# EAGLE board esquematico3 (EAGLE 9.2.1)
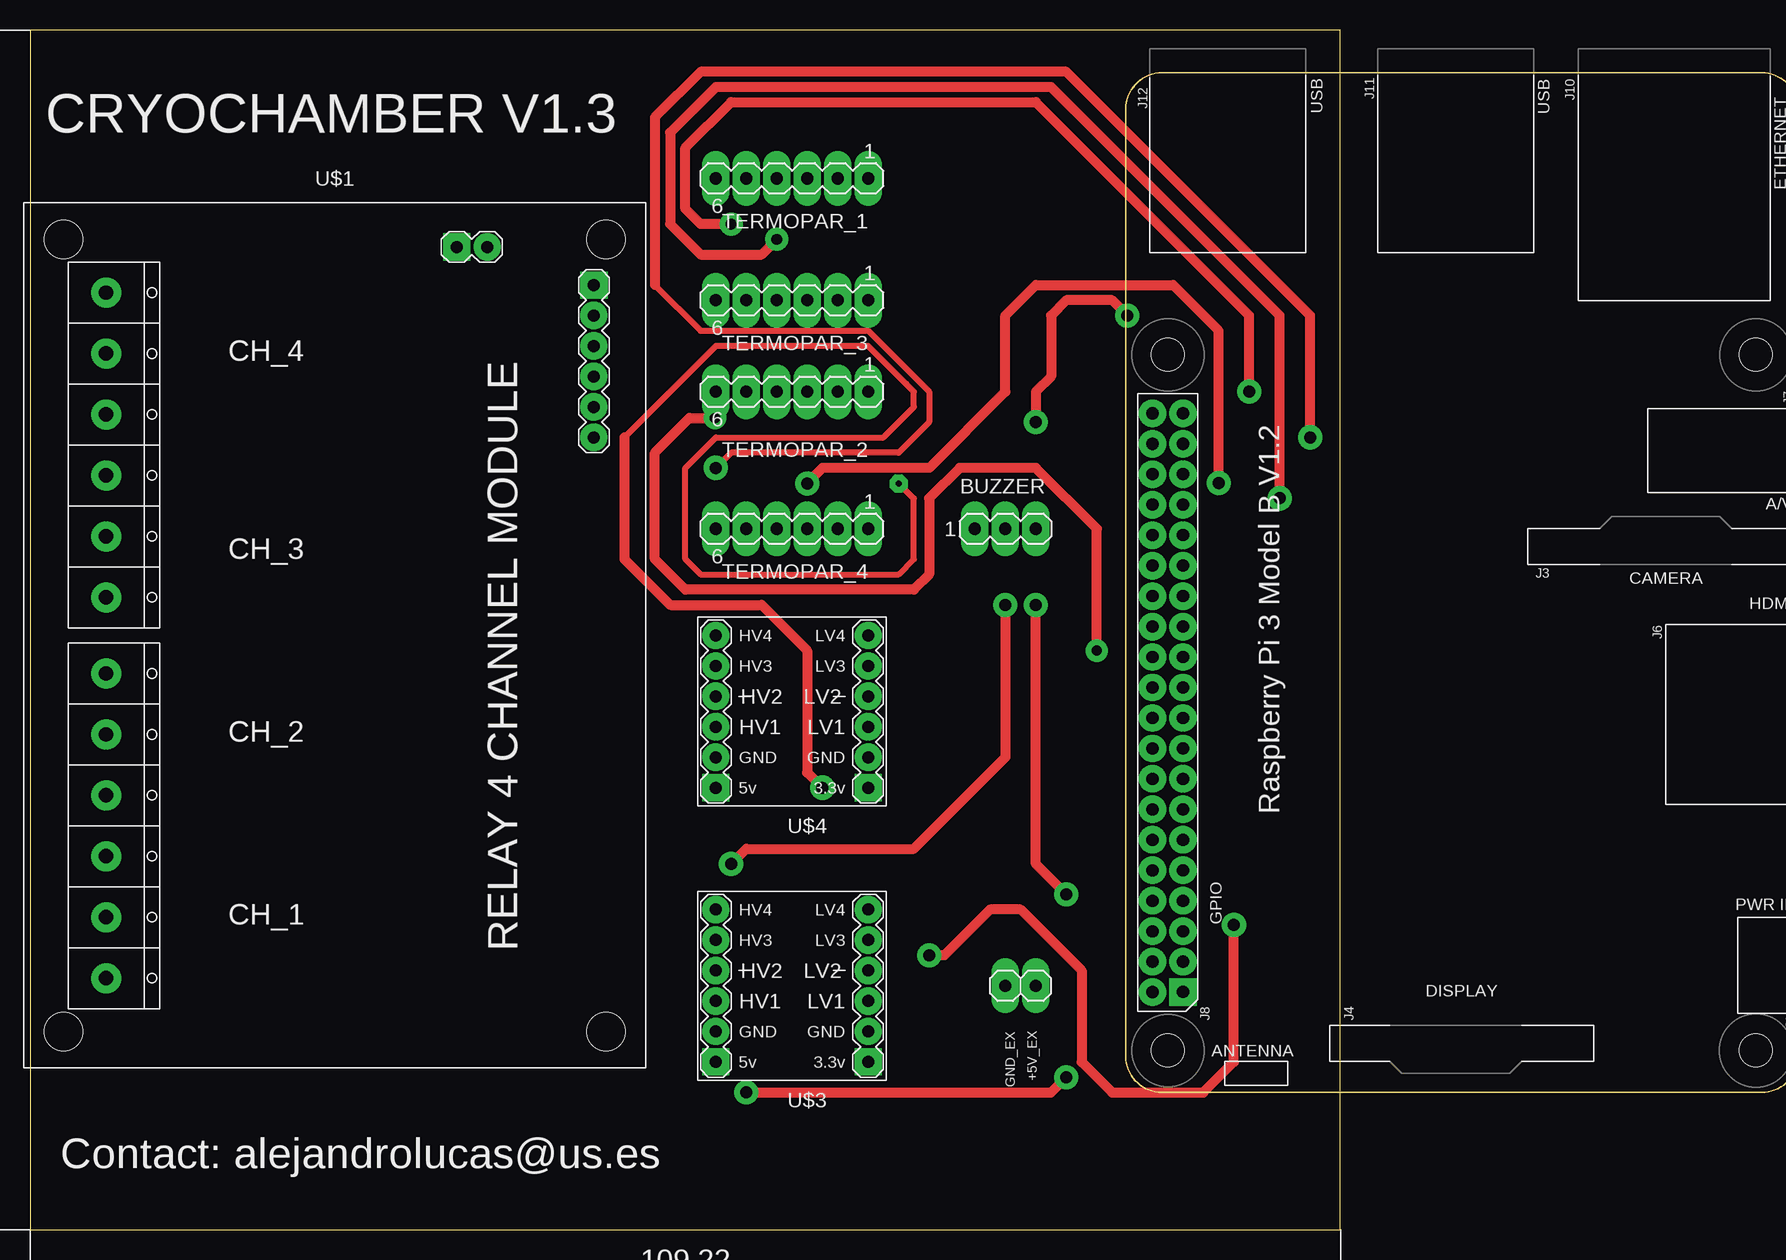
[diagram p0: board, top side]
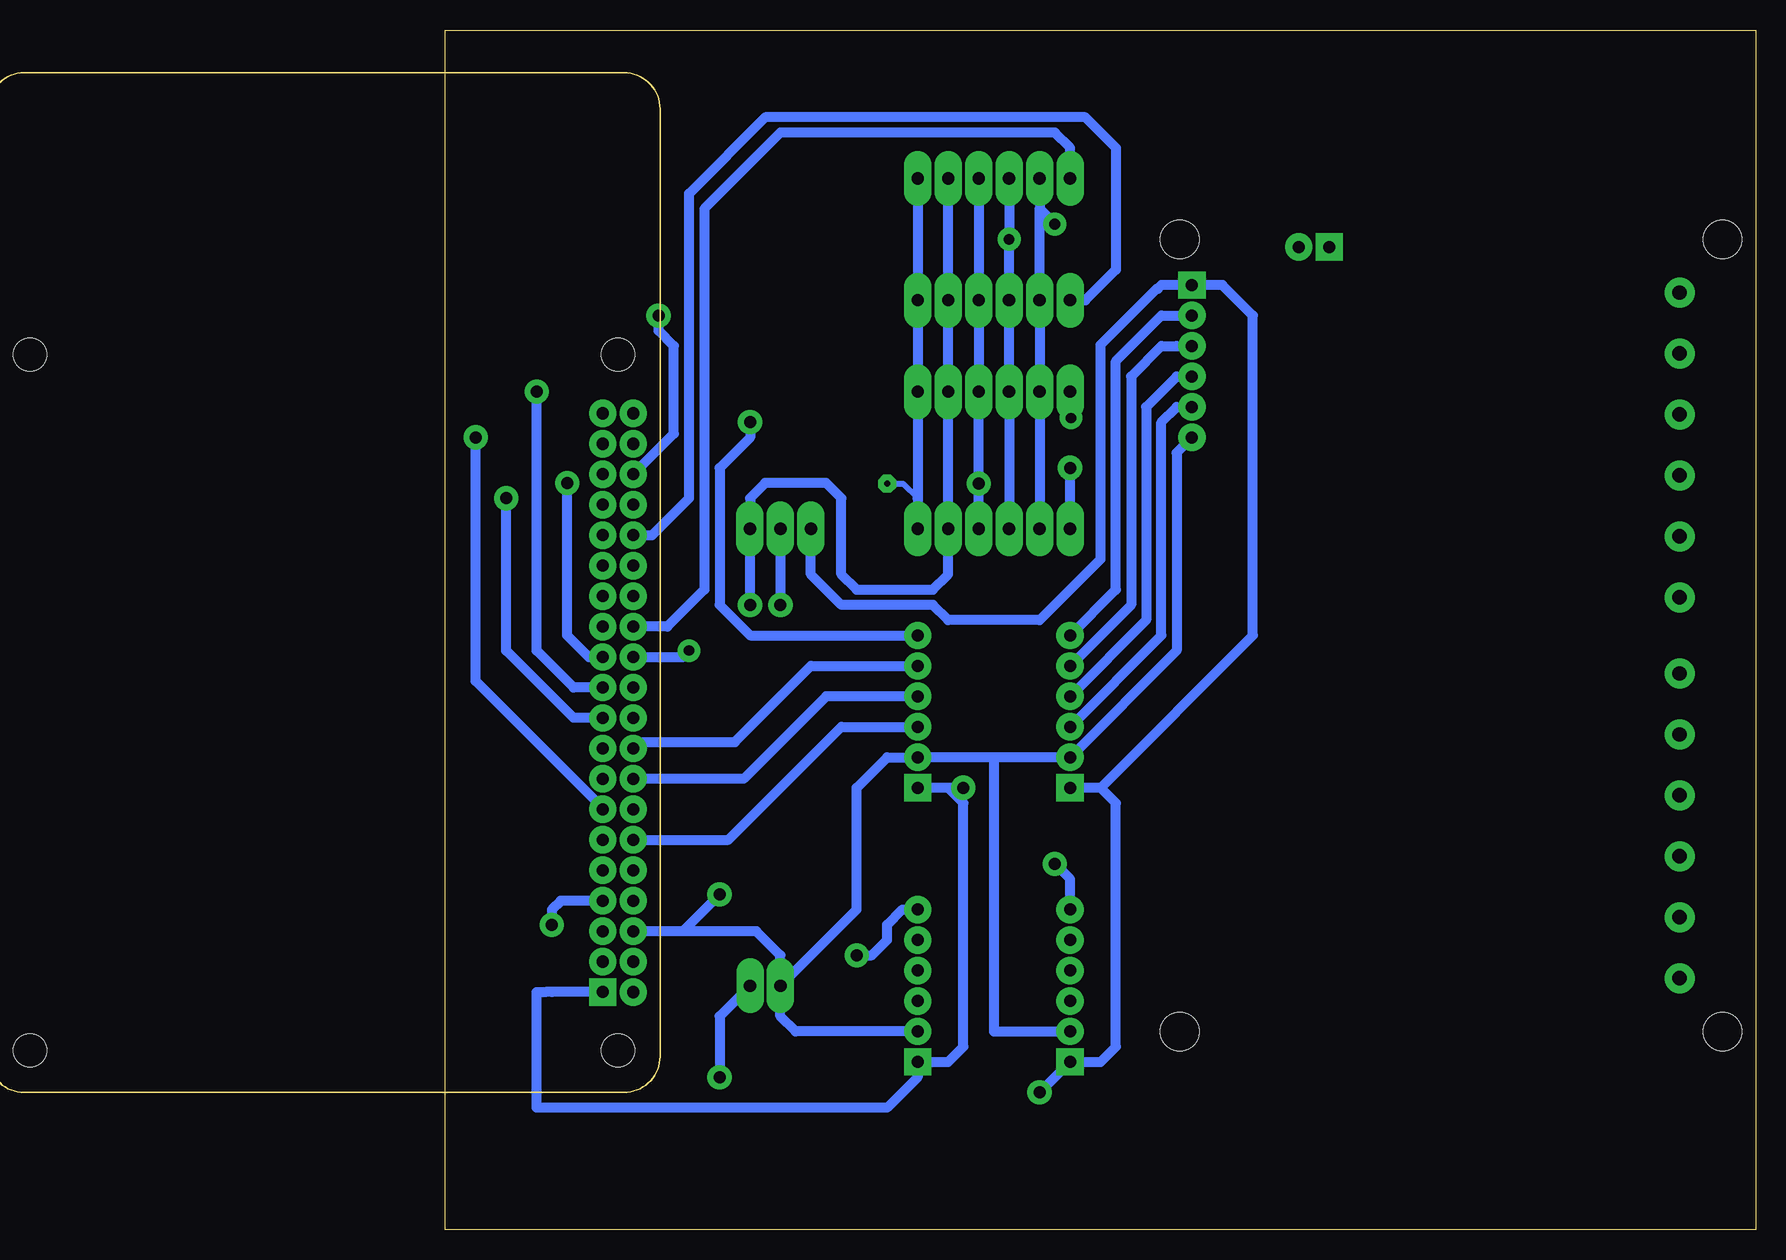
[diagram p1: board, bottom side, seen from below]

Size 109.2 x 100 mm. Coordinates in mm from the lower left corner, seen from the top.
Outline: 0,0 109.2,0 109.2,100 0,100 0,0
Copper layers (1*16): Top 0.035mm / dielectric 1.5mm / Bottom 0.035mm
Design rules "default *": minimum track width 6mil, minimum drill 0.35mm, track to track 6mil, track to pad 6mil, pad to pad 6mil, via to via 6mil, smd to smd 6mil, copper to edge 40mil, drill to drill 6mil, minimum pad ring 25mil, minimum via ring 20mil, stop-mask expansion 4mil, vias tented up to drill 0mil, thermal gap 10mil

## Footprints (pad centres in the part's own frame; a part is rotated, then mirrored left to right if it is on the bottom)
1X02 = drill 1.016 long: 1 -1.27,0; 2 1.27,0
MA03-1 = drill 1.016 long: 1 -2.54,0; 2 0,0; 3 2.54,0
RPI3 = drill 1.016 square: P$1 8.37,51.23 | drill 1.016: P$2 8.357,53.772; P$3 10.897,51.232; P$4 10.897,53.772; P$5 13.437,51.232; P$6 13.437,53.772; P$7 15.977,51.232; P$8 15.977,53.772; P$9 18.517,51.232; P$10 18.517,53.772; P$11 21.057,51.232; P$12 21.057,53.772; P$13 23.597,51.232; P$14 23.597,53.772; P$15 26.137,51.232; P$16 26.137,53.772; P$17 28.677,51.232; P$18 28.677,53.772; P$19 31.217,51.232; P$20 31.217,53.772; P$21 33.757,51.232; P$22 33.757,53.772; P$23 36.297,51.232; P$24 36.297,53.772; P$25 38.837,51.232; P$26 38.837,53.772; P$27 41.377,51.232; P$28 41.377,53.772; P$29 43.917,51.232; P$30 43.917,53.772; P$31 46.457,51.232; P$32 46.457,53.772; P$33 48.997,51.232; P$34 48.997,53.772; P$35 51.537,51.232; P$36 51.537,53.772; P$37 54.077,51.232; P$38 54.077,53.772; P$39 56.617,51.232; P$40 56.617,53.772 | hole 2.75: 3.5,3.5; 61.5,3.5; 3.5,52.5; 61.5,52.5
MA06-1 = drill 1.016 long: 1 -6.35,0; 2 -3.81,0; 3 -1.27,0; 4 1.27,0; 5 3.81,0; 6 6.35,0
RELAY-4-SRD#RC = drill 1 square: J1.1 20.32,29.21; J2.1 8.89,32.385 | drill 1: J1.2 20.32,26.67; J1.3 20.32,24.13; J1.4 20.32,21.59; J1.5 20.32,19.05; J1.6 20.32,16.51; J2.2 11.43,32.385 | drill 1.2 pad 2.5: P1.1 -20.32,28.575; P1.2 -20.32,23.495; P1.3 -20.32,18.415; P1.4 -20.32,13.335; P1.5 -20.32,8.255; P1.6 -20.32,3.175; P2.1 -20.32,-3.175; P2.2 -20.32,-8.255; P2.3 -20.32,-13.335; P2.4 -20.32,-18.415; P2.5 -20.32,-23.495; P2.6 -20.32,-28.575 | hole 3.2: -23.876,33.02; 21.336,33.02; 21.336,-33.02; -23.876,-33.02
LEVEL-SHIFTER-4CH = drill 1 square: J1.1 -5.08,6.35; J2.1 7.62,6.35 | drill 1: J1.2 -5.08,3.81; J1.3 -5.08,1.27; J1.4 -5.08,-1.27; J1.5 -5.08,-3.81; J1.6 -5.08,-6.35; J2.2 7.62,3.81; J2.3 7.62,1.27; J2.4 7.62,-1.27; J2.5 7.62,-3.81; J2.6 7.62,-6.35

## Placement (x,y rotation side)
+5V_EX  [1X02]  82.55,20.32 180 top
BUZZER  [MA03-1]  81.28,58.42 0 top
PCB1  RPI3RPI3  [RPI3]  147.32,11.43 90 top
TERMOPAR_1  [MA06-1]  63.5,87.63 180 top
TERMOPAR_2  [MA06-1]  63.5,69.85 180 top
TERMOPAR_3  [MA06-1]  63.5,77.47 180 top
TERMOPAR_4  [MA06-1]  63.5,58.42 180 top
U$1  RELAY-4-SRD#RC  [RELAY-4-SRD#RC]  26.67,49.53 0 top
U$3  LEVEL-SHIFTER-4CH  [LEVEL-SHIFTER-4CH]  64.77,20.32 180 top
U$4  LEVEL-SHIFTER-4CH  [LEVEL-SHIFTER-4CH]  64.77,43.18 180 top

## Library data of the parts
+5V_EX = pinhead
BUZZER TERMOPAR_1-TERMOPAR_4 = con-lstb; OC_FARNELL: unknown; OC_NEWARK: unknown
PCB1 = e14_Rpi3_RevA+mirror-pcb
U$1 = diy-modules
U$3 U$4 = diy-modules_modified

## Nets
+5V: +5V_EX.1 BUZZER.1 U$1.J1.1 U$3.J2.1 U$4.J2.1
GND: +5V_EX.2 BUZZER.3 PCB1.P$6 TERMOPAR_1.2 TERMOPAR_2.2 TERMOPAR_3.2 TERMOPAR_4.2 U$1.J1.6 U$3.J1.2 U$3.J2.2 U$4.J1.2 U$4.J2.2
GND.1: U$3.J1.4
GND.2: U$3.J2.4
HV: U$3.J2.3
LV: U$3.J1.3
N$1: U$1.J1.2 U$4.J2.6
N$2: U$1.J1.3 U$4.J2.5
N$3: U$1.J1.4 U$4.J2.4
N$4: U$1.J1.5 U$4.J2.3
N$5: PCB1.P$12 U$4.J1.3
N$6: PCB1.P$16 U$4.J1.4
N$7: PCB1.P$18 U$4.J1.5
N$8: PCB1.P$36 U$4.J1.6
N$9: PCB1.P$7 U$3.J1.6
N$10: BUZZER.2 U$3.J2.6
N$14: PCB1.P$1 TERMOPAR_1.1 TERMOPAR_2.1 TERMOPAR_3.1 TERMOPAR_4.1 U$3.J1.1 U$4.J1.1
N$16: PCB1.P$23 TERMOPAR_1.3 TERMOPAR_2.3 TERMOPAR_3.3 TERMOPAR_4.3
N$17: PCB1.P$19 TERMOPAR_1.4 TERMOPAR_2.4 TERMOPAR_3.4 TERMOPAR_4.4
N$18: PCB1.P$21 TERMOPAR_1.5 TERMOPAR_2.5 TERMOPAR_3.5 TERMOPAR_4.5
N$19: PCB1.P$13 TERMOPAR_4.6
N$21: PCB1.P$26 TERMOPAR_1.6
N$22: PCB1.P$32 TERMOPAR_3.6
S$20: PCB1.P$24 TERMOPAR_2.6
VCC.2: U$1.J2.2

## Tracks (layer width: path | path; a pad name or v marks a point on that pad's centre or on a via)
+5V  (via drill 1)
  Top 0.813: v86.36,12.7 85.09,11.43 v59.69,11.43
  Bottom 0.813: 54.61,36.83 41.91,49.53 41.91,76.2 44.45,78.74 U$1.J1.1 49.53,78.74 49.84,78.44 49.93,78.44 54.61,73.75 54.61,55.88 59.69,50.8 67.31,50.8 68.58,52.07 76.2,52.07 78.74,54.61 BUZZER.1 | 54.61,36.83 53.34,35.56 53.34,15.24 54.61,13.97 U$3.J2.1 v59.69,11.43 | +5V_EX.1 86.36,17.78 v86.36,12.7 | 54.61,36.83 U$4.J2.1
GND  (via drill 1)
  Top 0.813: v86.36,27.94 83.82,30.48 v83.82,52.07
  Bottom 0.813: 63.5,39.37 U$4.J2.2 48.26,48.26 48.26,64.77 U$1.J1.6 | 63.5,39.37 U$4.J1.2 72.39,39.37 74.93,36.83 74.93,26.67 +5V_EX.2 | U$3.J2.2 63.5,16.51 63.5,39.37 | TERMOPAR_1.2 TERMOPAR_3.2 TERMOPAR_2.2 TERMOPAR_4.2 67.31,54.61 68.58,53.34 74.93,53.34 76.2,54.61 76.2,60.96 77.47,62.23 82.55,62.23 83.82,60.96 BUZZER.3 v83.82,52.07 | +5V_EX.2 81.28,22.86 83.29,24.87 89.43,24.87 | 89.43,24.87 PCB1.P$6 | +5V_EX.2 81.28,17.78 80.01,16.51 U$3.J1.2 | v86.36,27.94 89.43,24.87
N$1
  Bottom 0.813: U$1.J1.2 49.53,76.2 53.34,72.39 53.34,53.34 U$4.J2.6
N$2
  Bottom 0.813: U$4.J2.5 52.07,52.07 52.07,71.12 49.53,73.66 48.26,73.66 U$1.J1.3
N$3
  Bottom 0.813: U$4.J2.4 50.8,50.8 50.8,68.58 48.26,71.12 U$1.J1.4
N$4
  Bottom 0.813: U$4.J2.3 49.53,49.53 49.53,67.31 48.26,68.58 U$1.J1.5
N$5
  Bottom 0.813: PCB1.P$12 85.62,32.49 76.2,41.91 U$4.J1.3
N$6
  Bottom 0.813: PCB1.P$16 84.35,37.57 77.47,44.45 U$4.J1.4
N$7
  Bottom 0.813: PCB1.P$18 93.02,40.64 85.09,40.64 78.74,46.99 U$4.J1.5
N$8  (via drill 1)
  Top 0.813: v83.82,67.31 83.82,69.85 85.09,71.12 85.09,76.2 86.36,77.47 90.17,77.47 v91.44,76.2
  Bottom 0.813: v83.82,67.31 83.82,66.04 86.36,63.5 86.36,52.07 83.82,49.53 U$4.J1.6 | PCB1.P$36 90.17,66.34 90.17,73.66 91.44,74.93 v91.44,76.2
N$9  (via drill 1)
  Top 0.813: v100.33,25.4 100.33,13.97 97.79,11.43 90.17,11.43 87.63,13.97 87.63,21.59 82.55,26.67 80.01,26.67 76.2,22.86 v74.93,22.86
  Bottom 0.813: PCB1.P$7 99.59,27.41 100.33,26.67 v100.33,25.4 | v74.93,22.86 73.66,22.86 72.39,24.13 72.39,25.4 71.12,26.67 U$3.J1.6
N$10  (via drill 1)
  Top 0.813: v81.28,52.07 81.28,39.37 73.66,31.75 59.69,31.75 v58.42,30.48
  Bottom 0.813: BUZZER.2 v81.28,52.07 | U$3.J2.6 57.15,29.21 v58.42,30.48
N$14  (via drill 0.5 pad 1.3, 1)
  Top 0.508: 49.53,66.04 57.15,73.66 69.85,73.66 73.02,70.48 73.66,69.85 73.66,68.58 71.12,66.04 57.15,66.04 54.61,63.5 54.61,55.88 55.88,54.61 72.39,54.61 73.66,55.88 73.66,60.96 73.61,60.96 v72.39,62.18
  Top 0.813: 49.53,66.04 49.53,55.88 53.34,52.07 60.96,52.07 64.77,48.26 64.77,38.1 v66.04,36.83
  Bottom 0.508: v72.39,62.18 71.07,62.18 69.85,60.96
  Bottom 0.813: TERMOPAR_1.1 TERMOPAR_3.1 TERMOPAR_2.1 69.85,60.96 TERMOPAR_4.1 | PCB1.P$1 100.33,19.8 100.85,19.8 101.6,19.8 101.6,10.16 72.39,10.16 69.85,12.7 U$3.J1.1 67.31,13.97 66.04,15.24 66.04,35.56 67.31,36.83 U$4.J1.1 v66.04,36.83
N$16  (via drill 1)
  Top 0.813: v99.06,62.23 99.06,74.93 95.25,78.74 83.82,78.74 81.28,76.2 81.28,69.85 74.93,63.5 66.04,63.5 64.77,62.23 v64.77,62.19
  Bottom 0.813: TERMOPAR_1.3 TERMOPAR_3.3 TERMOPAR_2.3 v64.77,62.19 TERMOPAR_4.3 | PCB1.P$23 97.26,47.73 99.06,49.53 v99.06,62.23
N$17  (via drill 0.9, 1)
  Top 0.813: v104.14,60.96 104.14,76.2 85.09,95.25 57.15,95.25 53.34,91.44 53.34,83.82 55.88,81.28 60.96,81.28 v62.23,82.55
  Bottom 0.813: TERMOPAR_4.4 TERMOPAR_2.4 TERMOPAR_3.4 | 62.23,78.74 TERMOPAR_3.4 | TERMOPAR_1.4 v62.23,82.55 TERMOPAR_3.4 | PCB1.P$19 98.53,42.65 104.14,48.26 v104.14,60.96
N$18  (via drill 0.9, 1)
  Top 0.813: v101.6,69.85 101.6,76.2 83.82,93.98 58.42,93.98 54.61,90.17 54.61,85.09 55.88,83.82 v58.42,83.82
  Bottom 0.813: TERMOPAR_4.5 TERMOPAR_2.5 TERMOPAR_3.5 59.69,85.09 | PCB1.P$21 98.53,45.19 101.6,48.26 v101.6,69.85 | TERMOPAR_1.5 59.69,85.09 | 59.69,85.09 v58.42,83.82
N$19  (via drill 1)
  Top 0.508: 52.07,78.74 55.88,74.93 69.85,74.93 74.93,69.85 74.93,67.31 72.39,64.77 58.42,64.77 v57.15,63.5
  Top 0.813: 52.07,78.74 52.07,92.71 55.88,96.52 86.36,96.52 106.68,76.2 v106.68,66.04
  Bottom 0.813: PCB1.P$13 95.99,35.03 106.68,45.72 v106.68,66.04 | TERMOPAR_4.6 v57.15,63.5
N$21
  Bottom 0.813: TERMOPAR_1.6 57.15,90.17 58.42,91.44 81.28,91.44 87.63,85.09 87.63,53.34 90.7,50.27 PCB1.P$26
N$22
  Bottom 0.813: PCB1.P$32 91.97,57.89 88.9,60.96 88.9,86.36 82.55,92.71 55.88,92.71 53.34,90.17 53.34,80.01 55.88,77.47 TERMOPAR_3.6
S$20  (via drill 0.85)
  Top 0.813: v88.9,48.26 88.9,58.42 83.82,63.5 77.47,63.5 74.93,60.96 74.93,54.61 73.66,53.34 54.61,53.34 52.07,55.88 52.07,64.77 54.96,67.66 v57.08,67.66
  Bottom 0.813: PCB1.P$24 89.43,47.73 v88.9,48.26 | v57.08,67.66 57.15,67.73 TERMOPAR_2.6

## Text on the board
tNames: CRYOCHAMBER V1.3 | CH_4 | RELAY 4 CHANNEL MODULE | CH_3 | CH_2 | CH_1 | GND_EX | Contact: alejandrolucas@us.es